# EAGLE board Wheel Speed Sensor rev1 (EAGLE 9.5.0)

Size 132.06 x 100 mm. Coordinates in mm from the lower left corner, seen from the top.
Outline: 0,0 132.06,0 132.06,100 0,100 0,0
Copper layers (1*16): Top 0.035mm / dielectric 1.5mm / Bottom 0.035mm
Design rules "default *": minimum track width 16mil, minimum drill 0.35mm, track to track 16mil, track to pad 16mil, pad to pad 16mil, via to via 16mil, smd to smd 16mil, copper to edge 40mil, drill to drill 6mil, minimum pad ring 10mil, minimum via ring 8mil, stop-mask expansion 4mil, vias tented up to drill 0mil, thermal gap 10mil

## Footprints (pad centres in the part's own frame; a part is rotated, then mirrored left to right if it is on the bottom)
CAP-PTH-SMALLEZ = drill 0.7 pad 1.651: 1 0,0; 2 2.54,0
AXIAL-0.3 = drill 0.9 pad 1.88: P$1 -3.81,0; P$2 3.81,0
DIL08 = drill 0.813 long: 1 -3.81,-3.81; 2 -1.27,-3.81; 3 1.27,-3.81; 4 3.81,-3.81; 5 3.81,3.81; 6 1.27,3.81; 7 -1.27,3.81; 8 -3.81,3.81
TEENSY_3.2_SIMPLE = drill 0.8 long: 3.3V 16.51,29.21; A0 16.51,3.81; A1 16.51,6.35; A2 16.51,8.89; A3 16.51,11.43; A4 16.51,13.97; A5 16.51,16.51; A6 16.51,19.05; A7 16.51,21.59; A8 16.51,24.13; A9 16.51,26.67; AGND 16.51,31.75; D0(RX1) 1.27,31.75; D1(TX1) 1.27,29.21; D2 1.27,26.67; D3(CANTX) 1.27,24.13; D4(CANRX) 1.27,21.59; D5 1.27,19.05; D6 1.27,16.51; D7(RX3) 1.27,13.97; D8(TX3) 1.27,11.43; D9(RX2) 1.27,8.89; D10(TX2) 1.27,6.35; D11 1.27,3.81; D12 1.27,1.27; D13 16.51,1.27; GND 1.27,34.29; VIN 16.51,34.29
OKI-78SR = drill 1 pad 1.88 square: 1 -2.54,0 | drill 1 pad 1.88: 2 0,0; 3 2.54,0
MINIFIT_5566-2 = drill 1.4 square: 1 0,-2.75; 2 0,2.75
MINIFIT_5566-4 = drill 1.4 square: 1 2.1,-2.75; 2 -2.1,-2.75; 3 2.1,2.75; 4 -2.1,2.75

## Placement (x,y rotation side)
C1  1uF  [CAP-PTH-SMALLEZ]  33.02,20.32 270 top
C2  1uF  [CAP-PTH-SMALLEZ]  29.21,20.32 270 top
C3  [CAP-PTH-SMALLEZ]  15.24,15.24 0 top
C4  [CAP-PTH-SMALLEZ]  -16.51,13.97 90 top  (outside the outline)
R1  1000  [AXIAL-0.3]  36.83,62.23 90 top
R2  1000  [AXIAL-0.3]  35.56,83.82 180 top
R3  150  [AXIAL-0.3]  19.05,85.09 90 top
R4  150  [AXIAL-0.3]  29.21,44.45 180 top
U$1  MCP6002PDIP  [DIL08]  21.59,73.66 180 top
U$2  TEENSY_3.2_SIMPLE  [TEENSY_3.2_SIMPLE]  59.69,69.85 180 top
U$3  MCP2551DIL  [DIL08]  46.99,13.97 270 top
U$4  OKI-78SR-5  [OKI-78SR]  16.51,21.59 0 top
X1  Sensor 1  [MINIFIT_5566-2]  12.7,83.82 0 top
X2  Sensor 2  [MINIFIT_5566-2]  21.59,38.1 0 top
X4  CONNECTOR-4  [MINIFIT_5566-4]  -38.1,6.35 90 top  (outside the outline)
X5  CONNECTOR-4  [MINIFIT_5566-4]  -38.1,-6.35 90 top  (outside the outline)

## Library data of the parts
C1-C4 R1-R4 U$1-U$4 = HyTechDevices
X1 X2 = HyTechDevices; OC_FARNELL: 1822072; OC_NEWARK: unknown
X4 X5 = HyTechDevices; OC_FARNELL: unknown; OC_NEWARK: unknown

## Nets
3.3V: C1.2 C2.2 R1.P$1 U$1.8 U$2.3.3V U$3.3
5V: C3.2 U$2.VIN U$4.3
CANH: U$3.7 X4.3 X5.3
GND: C1.1 C2.1 C3.1 C4.1 R2.P$2 R3.P$2 R4.P$1 U$1.4 U$2.GND U$3.2 U$3.8 U$4.2 X4.4 X5.4
N$2: R1.P$2 R2.P$1 U$1.2 U$1.6
N$3: U$3.6 X4.2 X5.2
N$4: R3.P$1 U$1.3 X1.2
N$5: U$1.7 U$2.A1
N$6: U$1.1 U$2.D10(TX2)
N$8: R4.P$2 U$1.5 X2.2
RX: U$2.A9 U$3.4
TX: U$2.A8 U$3.1
VIN: C4.2 U$4.1 X1.1 X2.1 X4.1 X5.1

## Tracks (layer width: path | path; a pad name or v marks a point on that pad's centre or on a via)
3.3V  (5 unrouted)
5V  (2 unrouted)
CANH  (2 unrouted)
GND  (13 unrouted)
N$2  (3 unrouted)
N$3  (2 unrouted)
N$4  (2 unrouted)
N$5  (1 unrouted)
N$6  (1 unrouted)
N$8  (2 unrouted)
RX  (1 unrouted)
TX  (1 unrouted)
VIN  (5 unrouted)